# Altium PCB PCB.PcbDoc (part 2 of 2)
Units mm, origin at the board's own origin, x right, y up, seen from the top; angles counter-clockwise.
Board outline 180 x 79 mm, 2 copper layers (Top Layer, Bottom Layer); 169 components, 170 nets, 770 pads, 214 vias.
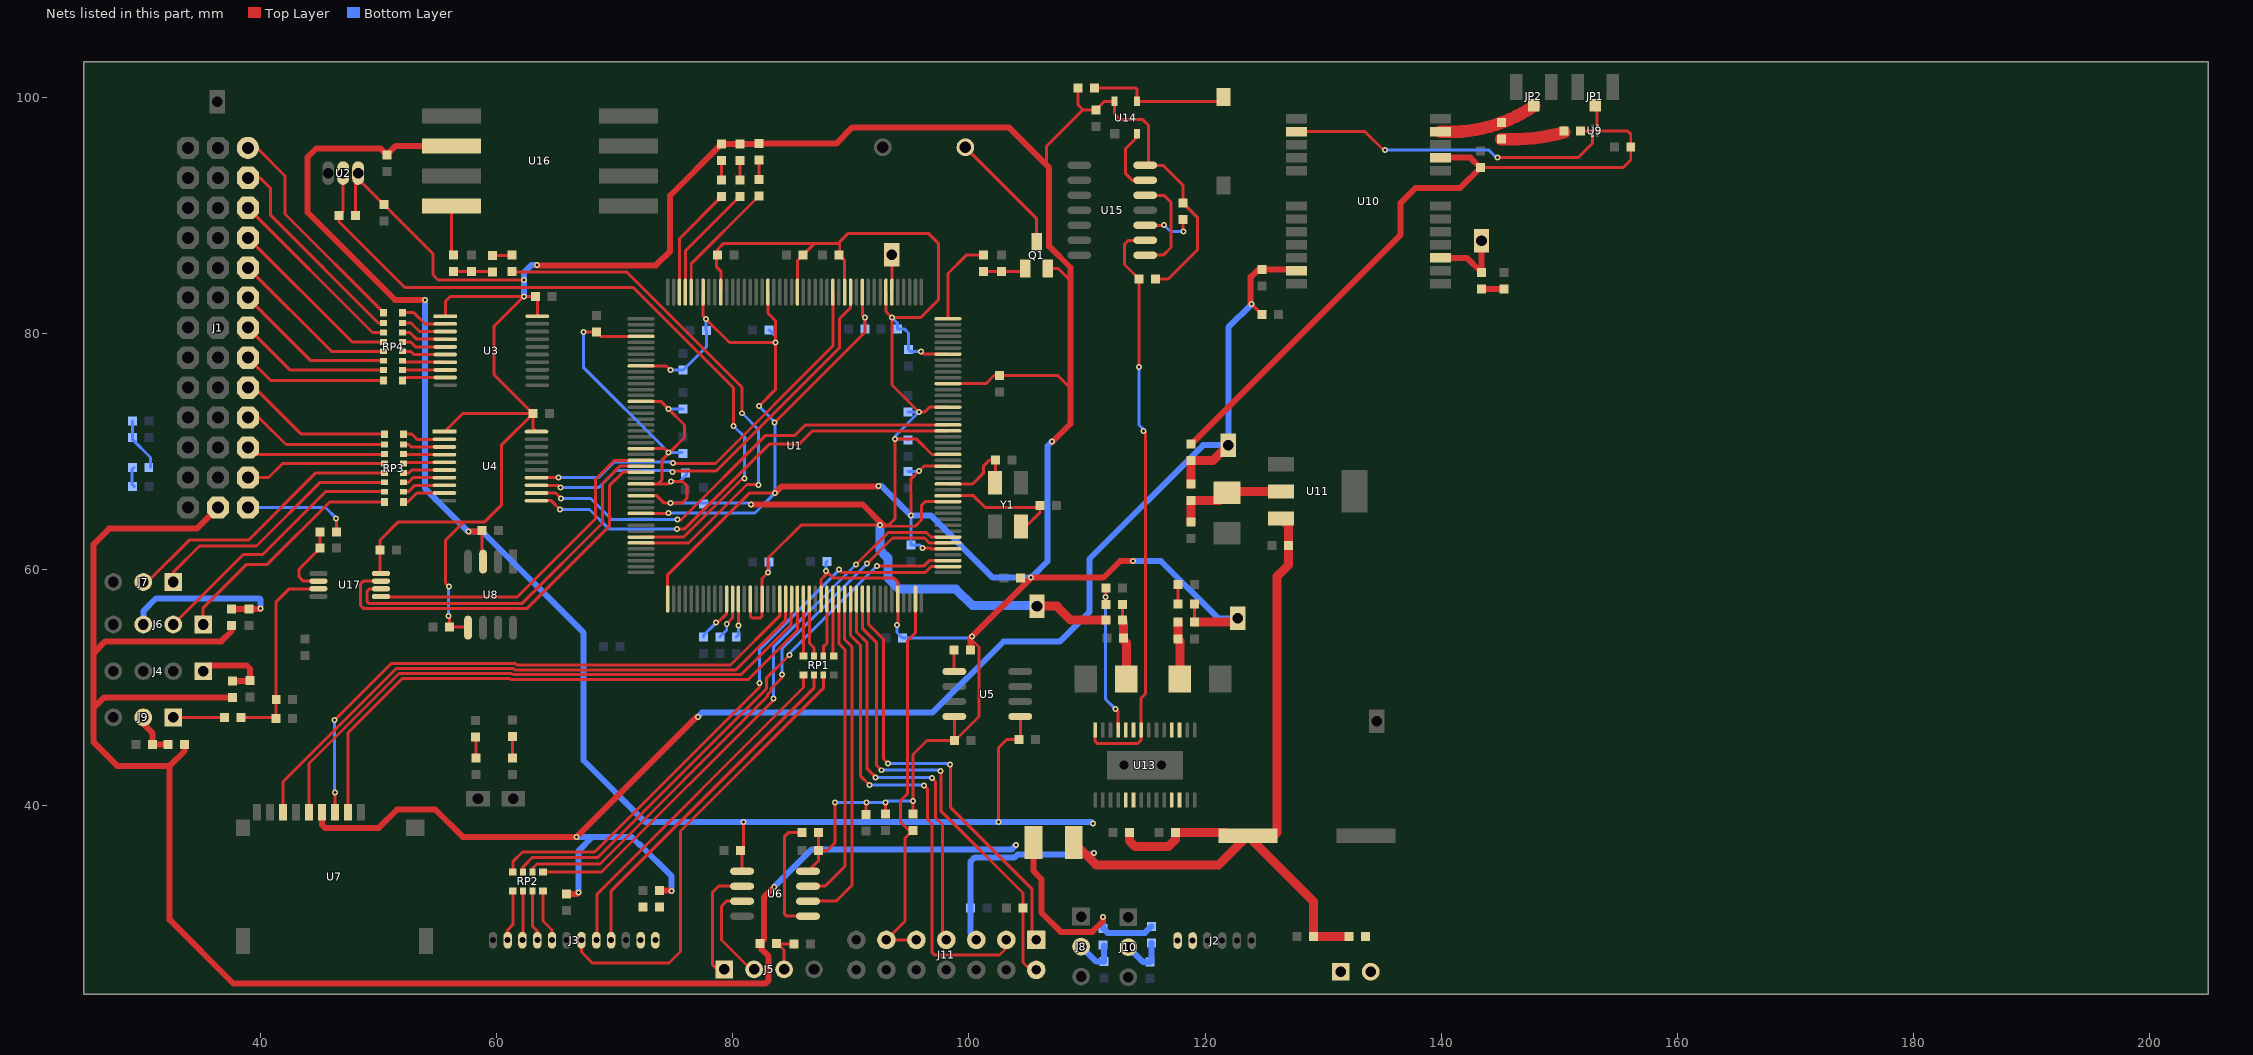
[diagram p2: the nets of this part, all layers, seen from the top]

## Via types
v1: diameter 0.508, hole 0.254, Top Layer to Bottom Layer, 214 vias

## Nets (pads, with @x,y where several pads share a name; then routed paths per layer and width w, separated by ;. In a path a pad name is that pad's centre, name@x,y a point inside that pad or via, vN(x,y) a via of type N, cw(c..) or ccw(c..) an arc to the next point about the centre after c; other vN are vias at no path point) (continued)
ISENSOR_CLK: J3.7 RP1.3 | length 38.6
  Top Layer w0.254: J3.7@67.159,28.575 67.159,27.566 68.075,26.65 74.575,26.65 75.55,27.625 75.55,37.825 87.654,49.929 RP1.3@87.654,51.054
ISENSOR_DIO1: J3.2 RP2.1 | length 4.4
  Top Layer w0.254: J3.2@60.911,28.575 60.911,29.436 61.35,29.875 RP2.1@61.35,32.75
ISENSOR_DIO2: J3.3 RP2.2 | length 4.2
  Top Layer w0.254: J3.3@62.156,28.575 62.225,28.644 RP2.2@62.225,32.75
ISENSOR_DIO3: J3.4 RP2.3 | length 4.3
  Top Layer w0.254: RP2.3@63.025,32.75 63.025,29.75 63.426,29.349 J3.4@63.426,28.575
ISENSOR_DIO4: J3.5 RP2.4 | length 4.5
  Top Layer w0.254: RP2.4@63.9,32.75 63.9,30.2 64.67,29.43 J3.5@64.67,28.575
ISENSOR_SIMO: J3.8 RP1.1 | length 29.7
  Top Layer w0.254: J3.8@68.429,28.575 68.475,28.621 68.475,32.475 85.979,49.979 RP1.1@85.979,51.054
ISENSOR_SOMI: J3.9 RP1.2 | length 29.6
  Top Layer w0.254: J3.9@69.679,28.575 69.679,32.757 86.854,49.932 RP1.2@86.854,51.054
LAN_EN: U9.6 U10.14 | length 27.3
  Top Layer w0.254: U10.14@127.758,97.086 133.564,97.086 135.25,95.4 v1(135.25,95.525) ; v1(144.775,94.9) 151.625,94.9 152.835,96.11 U9.6@152.835,96.755
  Bottom Layer w0.254: v1(135.25,95.525) 144.05,95.525 144.725,94.85 v1(144.775,94.9)
NetB1_1: B1.1 Q1.3 | length 10.5
  Top Layer w0.254: B1.1@99.691,95.762 105.74,89.712 Q1.3@105.74,87.757
NetC23_1: C23.1 U1.56 | length 3.7
  Top Layer w0.254: v1(79.475,55.375) 79.967,55.867 U1.56@79.967,57.485
  Bottom Layer w0.254: C23.1@78.883,54.26 79.475,54.852 v1(79.475,55.375)
NetC24_1: C24.1 U1.55 | length 4.1
  Top Layer w0.254: v1(78.575,55.475) 78.7,55.475 79.467,56.242 U1.55@79.467,57.485
  Bottom Layer w0.254: C24.1@77.486,54.26 77.486,54.386 v1(78.575,55.475)
NetC25_2: C25.2 U1.104 Y1.3 | length 7.2
  Top Layer w0.254: U1.104@98.217,67.235 100.31,67.235 101.25,68.175 101.25,68.775 101.725,69.25 C25.2@102.253,69.25 102.253,67.378 Y1.3@102.2,67.325
NetC26_2: C26.2 U1.102 Y1.1 | length 10.9
  Top Layer w0.254: U1.102@98.217,66.235 100.365,66.235 101.35,65.25 105.853,65.25 C26.2@106.003,65.4 106.003,64.803 104.825,63.625 Y1.1@104.4,63.625
NetC27_2: C27.2 Q1.1 R6.2 | length 3.7
  Top Layer w0.254: R6.2@101.219,85.217 C27.2@102.743,85.217 104.521,85.217 Q1.1@104.775,85.471
NetC37_1: C37.1 L1.2 | length 5.4
  Top Layer w1.067: C37.1@145.125,96.45 ccw(c145.962,113.288) L1.2@150.456,97.039
NetC45_1: C45.1 C47.2 R15.2 U11.2 | length 9.8
  Top Layer w0.762: C47.2@118.8,63.997 118.8,65.816 R15.2@118.828,65.844 121.241,65.844 C45.1@121.876,66.479 122.003,66.606 U11.2@126.448,66.606
NetC48_2: C48.2 C49.1 R19.2 U13.17 U13.18 | length 4.9
  Top Layer w0.762: R19.2@117.708,55.523 117.703,55.518 C48.2@117.703,54.1 117.871,53.932 C49.1@117.871,50.7
NetC50_2: C50.2 C51.1 R17.1 R21.2 U13.23 U13.24 | length 6.2
  Top Layer w0.254: R21.2@112.997,55.7 113,55.703 R17.1@113,57
  Top Layer w0.762: R21.2@113.09,55.523 113.09,54.013 113.329,53.774 C51.1@113.329,50.7
NetD1_1: D1.1 R33.2 U17.2 | length 6.4
  Top Layer w0.254: U17.2@44.875,59 43.6,59 43.225,59.375 43.225,60 D1.1@45.025,61.8 45.025,63.153 R33.2@45.003,63.175
NetD2_1: D2.1 R32.1 R34.2 U17.3 | length 16.7
  Top Layer w0.254: R34.2@38.325,47.425 D2.1@41.2,47.425 ; D2.1@41.272,47.375 41.272,48.941 R32.1@41.302,48.971 ; R32.1@41.3,49.021 41.3,57.25 42.4,58.35 U17.3@44.875,58.35
NetFB1_1: FB1.1 J3.11 J3.12 VDR1.2
NetFB2_1: FB2.1 J4.1 VDR4.2 | length 6.8
  Top Layer w0.508: J4.1@35.115,51.375 35.59,51.85 38.8,51.85 39.075,51.575 VDR4.2@39.075,50.572 39.051,50.548 FB2.1@37.6,50.548
NetFB3_1: FB3.1 J5.3 VDR2.2 | length 3.7
  Top Layer w0.254: J5.3@84.332,26.098 84.332,27.749 83.824,28.257 VDR2.2@85.158,28.257
NetFB4_1: FB4.1 J6.3 VDR3.2 | length 14.8
  Top Layer w0.508: FB4.1@37.525,56.623 38.998,56.623 VDR3.2@39,56.622 39.922,56.622 v1(39.975,56.675)
  Bottom Layer w0.508: J6.3@30.035,55.325 30.035,56.46 31.1,57.525 39.875,57.525 39.975,57.425 v1(39.975,56.675)
NetFB5_1: FB5.1 J10.2 VDR5.2 | length 4
  Bottom Layer w0.254: VDR5.2@115.35,26.722 VDR5.2@115.45,26.822
  Bottom Layer w0.508: J10.2@113.5,27.985 114.763,26.722 VDR5.2@115.35,26.722 ; VDR5.2@115.45,26.822 FB5.1@115.45,28.352
NetFB6_1: FB6.1 J8.2 VDR6.1 | length 3.9
  Bottom Layer w0.254: FB6.1@111.375,28.176 FB6.1@111.425,28.127
  Bottom Layer w0.508: J8.2@109.5,28.035 110.785,26.75 VDR6.1@111.425,26.75 FB6.1@111.425,28.127
NetFB7_1: FB7.1 J9.2 VDR7.2 | length 4
  Top Layer w0.254: J9.2@30.035,46.915 J9.2@30.035,47.45
  Top Layer w0.508: J9.2@30.035,46.915 30.805,46.145 VDR7.2@30.805,45.149 FB7.1@32.139,45.149
NetFB8_1: FB8.1 SW1.2
NetFB10_2: FB10.2 R26.2 | length 1.8
  Top Layer w0.254: R26.2@58.175,45.803 58.225,45.753 FB10.2@58.225,44.023
NetFB11_2: FB11.2 R27.2 | length 1.8
  Top Layer w0.254: R27.2@61.331,45.844 R27.2@61.331,45.844 FB11.2@61.332,44.004
NetFB12_1: FB12.1 R24.2 R25.1 | length 4.6
  Bottom Layer w0.254: R24.2@29.103,72.575 29.103,71.022 30.649,69.476 FB12.1@30.649,68.625
NetFB12_2: FB12.2 R28.2 | length 1.7
  Bottom Layer w0.254: FB12.2@29.252,68.625 29.1,68.474 29.1,67.203 R28.2@29.278,67.025
NetFB13_1: FB13.1 R29.2 R30.1 | length 3.3
  Top Layer w0.254: R30.1@56.326,85.253 R29.2@57.85,85.253 59.564,85.253 FB13.1@59.628,85.19
NetFB13_2: FB13.2 R31.2 | length 1.7
  Top Layer w0.254: FB13.2@59.628,86.587 61.216,86.587 R31.2@61.279,86.65
NetJP1_2: JP1.2 U9.3 | length 1.8
  Top Layer w0.254: JP1.2@153.07,99.327 153.235,99.162 U9.3@153.235,97.555
NetK1_2: K1.2 R22.1 U14.3 | length 12.2
  Top Layer w0.254: R22.1@110.625,100.775 114.15,100.775 114.236,100.689 U14.3@114.236,99.646 121.196,99.646 K1.2@121.575,100.025
NetL1_1: L1.1 U9.5 | length 1
  Top Layer w0.254: L1.1@151.828,97.128 151.856,97.155 U9.5@152.835,97.155
NetLED1_2: LED1.2 R2.2 | length 1.7
  Top Layer w0.254: R2.2@82.201,93.028 LED1.2@82.201,94.679
NetLED2_2: LED2.2 R3.2 | length 1.7
  Top Layer w0.254: R3.2@80.6,93.003 LED2.2@80.6,94.654
NetLED3_2: LED3.2 R4.2 | length 1.7
  Top Layer w0.254: R4.2@79.05,93.002 LED3.2@79.05,94.653
NetLED4_1: LED4.1 R20.1 | length 1.7
  Top Layer w0.254: R20.1@117.708,57.047 LED4.1@117.708,58.698
NetLED5_1: LED5.1 R39.1 | length 1.9
  Top Layer w0.508: R39.1@143.44,83.743 LED5.1@145.345,83.743
NetR1_2: R1.2 U1.57 | length 3.3
  Top Layer w0.254: v1(80.45,55.225) 80.467,55.242 U1.57@80.467,57.485
  Bottom Layer w0.254: R1.2@80.28,54.26 80.45,54.43 v1(80.45,55.225)
NetR2_1: R2.1 U1.172 | length 10.5
  Top Layer w0.254: U1.172@76.467,83.485 76.467,85.897 R2.1@82.201,91.631
NetR3_1: R3.1 U1.173 | length 10
  Top Layer w0.254: U1.173@75.967,83.485 75.967,86.973 R3.1@80.6,91.606
NetR4_1: R4.1 U1.174 | length 9.6
  Top Layer w0.254: U1.174@75.467,83.485 75.467,88.022 R4.1@79.05,91.605
NetR6_1: R6.1 U1.132 | length 7.5
  Top Layer w0.254: U1.132@98.217,81.235 98.217,85.067 99.764,86.614 R6.1@101.219,86.614
NetR8_1: R8.1 U5.5 | length 1.8
  Top Layer w0.254: R8.1@98.725,53.175 98.725,51.372 U5.5@98.757,51.34
NetR9_1: R9.1 U6.5 | length 10.3
  Top Layer w0.254: R9.1@85.852,37.719 84.719,37.719 84.35,37.35 84.35,30.825 84.568,30.607 U6.5@86.36,30.607
NetR17_2: R17.2 R18.2 U13.25 | length 13.1
  Top Layer w0.254: R17.2@111.603,57 R18.2@111.603,58.4 ; v1(112.4,48.175) 112.639,47.936 U13.25@112.639,46.378
  Bottom Layer w0.254: v1(111.575,57.675) 111.575,49 v1(112.4,48.175)
NetR23_1: R23.1 U15.10 | length 4.5
  Top Layer w0.254: U15.10@114.935,89.154 116.504,89.154 v1(116.525,89.175) ; R23.1@118.15,89.625 118.15,88.65 v1(118.175,88.625)
  Bottom Layer w0.254: v1(116.525,89.175) 117.075,88.625 v1(118.175,88.625)
NetR30_2: R30.2 U16.4 | length 4.5
  Top Layer w0.254: R30.2@56.109,86.867 R30.2@56.326,86.65 ; R30.2@56.134,86.592 U16.4@56.134,90.805
NetRP1_5: RP1.5 U1.73 | length 4.9
  Top Layer w0.254: U1.73@88.467,57.485 88.467,52.716 RP1.5@88.529,52.654
NetRP1_6: RP1.6 U1.72 | length 5
  Top Layer w0.254: RP1.6@87.654,52.654 87.654,53.429 87.967,53.742 U1.72@87.967,57.485
NetRP1_7: RP1.7 U1.69 | length 5
  Top Layer w0.254: U1.69@86.467,57.485 86.467,53.758 86.854,53.371 RP1.7@86.854,52.654
NetRP1_8: RP1.8 U1.68 | length 4.8
  Top Layer w0.254: U1.68@85.967,57.485 85.967,52.666 RP1.8@85.979,52.654
NetRP2_5: RP2.5 U1.95 | length 49
  Top Layer w0.254: RP2.5@63.9,34.35 68.866,34.35 83.45,48.934 v1(83.45,49.075) ; v1(90.425,60.4) 93.15,63.125 96.388,63.125 96.778,62.735 U1.95@98.217,62.735
  Bottom Layer w0.254: v1(83.45,49.075) 83.425,49.1 83.425,53.4 v1(90.425,60.4)
NetRP2_6: RP2.6 U1.94 | length 48.9
  Top Layer w0.254: RP2.6@63.025,34.35 63.025,34.664 63.4,35.039 68.739,35.039 82.917,49.217 82.917,49.367 83.231,49.682 83.231,49.881 84.175,50.825 v1(84.175,51.075) ; v1(91.35,60.475) 93.525,62.65 96.225,62.65 96.64,62.235 U1.94@98.217,62.235
  Bottom Layer w0.254: v1(84.175,51.075) 84.175,53.3 v1(91.35,60.475)
NetRP2_7: RP2.7 U1.91 | length 47.8
  Top Layer w0.254: RP2.7@62.225,34.35 62.225,34.809 62.991,35.575 68.55,35.575 82.825,49.85 82.825,50.775 v1(84.8,52.75) ; v1(92.2,60.3) 96.2,60.3 96.635,60.735 U1.91@98.217,60.735
  Bottom Layer w0.254: v1(84.8,52.75) 84.8,52.9 v1(92.2,60.3)
NetRP2_8: RP2.8 U1.90 | length 50.2
  Top Layer w0.254: RP2.8@61.35,34.35 61.35,35.225 62.175,36.05 68.286,36.05 82.25,50.014 v1(82.25,50.375) ; v1(89,59.975) 89.225,59.75 96.325,59.75 96.81,60.235 U1.90@98.217,60.235
  Bottom Layer w0.254: v1(82.25,50.375) 82.25,53.25 82.262,53.238 v1(89,59.975)
NetRP3_9: RP3.9 U4.9 | length 3.8
  Top Layer w0.254: RP3.9@52.075,65.7 52.45,65.7 53.218,66.468 U4.9@55.555,66.468
NetRP3_10: RP3.10 U4.8 | length 3.7
  Top Layer w0.254: RP3.10@52.075,66.575 52.5,66.575 53.043,67.118 U4.8@55.555,67.118
NetRP3_11: RP3.11 U4.7 | length 3.6
  Top Layer w0.254: RP3.11@52.075,67.375 52.5,67.375 52.893,67.768 U4.7@55.555,67.768
NetRP3_12: RP3.12 U4.6 | length 3.6
  Top Layer w0.254: RP3.12@52.075,68.175 52.55,68.175 52.793,68.418 U4.6@55.555,68.418
NetRP3_13: RP3.13 U4.5 | length 3.5
  Top Layer w0.254: RP3.13@52.075,68.975 52.168,69.068 U4.5@55.555,69.068
NetRP3_14: RP3.14 U4.4 | length 3.5
  Top Layer w0.254: RP3.14@52.075,69.775 52.132,69.718 U4.4@55.555,69.718
NetRP3_15: RP3.15 U4.3 | length 3.6
  Top Layer w0.254: RP3.15@52.075,70.575 52.525,70.575 52.732,70.368 U4.3@55.555,70.368
NetRP3_16: RP3.16 U4.2 | length 3.7
  Top Layer w0.254: RP3.16@52.075,71.45 52.8,71.45 53.232,71.018 U4.2@55.555,71.018
NetRP4_9: RP4.9 U3.9 | length 3.7
  Top Layer w0.254: RP4.9@52,76 52.25,76.25 U3.9@55.625,76.25
NetRP4_10: RP4.10 U3.8 | length 3.6
  Top Layer w0.254: RP4.10@52,76.875 52.025,76.9 U3.8@55.625,76.9
NetRP4_11: RP4.11 U3.7 | length 3.7
  Top Layer w0.254: RP4.11@52,77.675 52.125,77.55 U3.7@55.625,77.55
NetRP4_12: RP4.12 U3.6 | length 3.7
  Top Layer w0.254: RP4.12@52,78.475 52.675,78.475 52.95,78.2 U3.6@55.625,78.2
NetRP4_13: RP4.13 U3.5 | length 3.8
  Top Layer w0.254: RP4.13@52,79.275 52.675,79.275 53.1,78.85 U3.5@55.625,78.85
NetRP4_14: RP4.14 U3.4 | length 3.9
  Top Layer w0.254: RP4.14@52,80.075 52.625,80.075 53.2,79.5 U3.4@55.625,79.5
NetRP4_15: RP4.15 U3.3 | length 3.9
  Top Layer w0.254: RP4.15@52,80.875 52.725,80.875 53.45,80.15 U3.3@55.625,80.15
NetRP4_16: RP4.16 U3.2 | length 4
  Top Layer w0.254: RP4.16@52,81.75 52.95,81.75 53.9,80.8 U3.2@55.625,80.8
NetU14_2: U14.2 U15.13 | length 5.7
  Top Layer w0.254: U14.2@114.236,96.921 114.236,96.611 113.275,95.65 113.275,93.525 113.836,92.964 U15.13@114.935,92.964
NetU15_8: U15.8 U15.12 | length 8.7
  Top Layer w0.254: U15.8@114.935,86.614 116.464,86.614 117.125,87.275 117.125,91.1 116.531,91.694 U15.12@114.935,91.694
POWER_RESET: R16.1 U13.22 U13.28 U15.9 | length 49.9
  Top Layer w0.254: U13.28@110.689,46.378 110.689,45.436 110.9,45.225 114.275,45.225 114.589,45.539 U13.22@114.589,46.378 114.589,49.089 114.975,49.475 114.975,71.55 v1(114.8,71.725) ; v1(114.4,77.125) R16.1@114.4,84.6 113.175,85.825 113.175,87.55 113.509,87.884 U15.9@114.935,87.884
  Bottom Layer w0.254: v1(114.4,77.125) 114.4,72.225 114.8,71.825 v1(114.8,71.725)
PWM1: J1.1 RP4.1 | length 19.2
  Top Layer w0.254: J1.1@38.897,95.713 39.662,95.713 42.05,93.325 42.05,90.1 RP4.1@50.4,81.75
PWM2: J1.4 RP4.2 | length 17.9
  Top Layer w0.254: J1.4@38.897,93.173 39.927,93.173 40.825,92.275 40.825,90 49.95,80.875 RP4.2@50.4,80.875
PWM3: J1.7 RP4.3 | length 15.9
  Top Layer w0.254: J1.7@38.897,90.633 49.455,80.075 RP4.3@50.4,80.075
PWM4: J1.10 RP4.4 | length 15.2
  Top Layer w0.254: J1.10@38.897,88.093 47.715,79.275 RP4.4@50.4,79.275
PWM5: J1.13 RP4.5 | length 14.4
  Top Layer w0.254: J1.13@38.897,85.553 45.975,78.475 RP4.5@50.4,78.475
PWM6: J1.16 RP4.6 | length 13.7
  Top Layer w0.254: J1.16@38.897,83.013 44.235,77.675 RP4.6@50.4,77.675
PWM7: J1.19 RP4.7 | length 13
  Top Layer w0.254: J1.19@38.897,80.473 42.495,76.875 RP4.7@50.4,76.875
PWM8: J1.22 RP4.8 | length 12.3
  Top Layer w0.254: J1.22@38.897,77.933 40.83,76 RP4.8@50.4,76
PWM9: J1.25 RP3.1 | length 13.2
  Top Layer w0.254: J1.25@38.897,75.393 39.482,75.393 43.425,71.45 RP3.1@50.475,71.45
PWM10: J1.28 RP3.2 | length 12.5
  Top Layer w0.254: J1.28@38.897,72.853 39.847,72.853 42.125,70.575 RP3.2@50.475,70.575
PWM11: J1.31 RP3.3 | length 11.8
  Top Layer w0.254: J1.31@38.897,70.313 39.485,69.725 50.425,69.725 RP3.3@50.475,69.775
PWM12: J1.34 RP3.4 | length 12.1
  Top Layer w0.254: J1.34@38.897,67.773 40.648,67.773 41.85,68.975 RP3.4@50.475,68.975
RF_IN: C37.2 JP2.2 U10.11 | length 8.6
  Top Layer w0.559: JP2.2@147.698,99.245 JP2.2@147.912,99.245
  Top Layer w1.067: U10.11@139.958,97.086 ccw(c140.76,109.626) JP2.2@147.889,99.279
S\B\U\S\_\E\N\: U1.27 U17.7 | length 34.3
  Top Layer w0.254: U17.7@50.175,59 48.675,59 48.45,58.775 48.45,56.925 48.675,56.7 62.575,56.7 69.525,63.65 69.525,67.075 70.685,68.235 U1.27@72.217,68.235
SBUS_RX: J9.1 R34.1 | length 4.4
  Top Layer w0.254: J9.1@32.575,47.45 36.903,47.45 R34.1@36.928,47.425
SBUS_TX: J1.37 R33.1 | length 9
  Top Layer w0.254: v1(46.375,64.325) 46.4,64.3 R33.1@46.4,63.175
  Bottom Layer w0.254: J1.37@38.897,65.233 45.467,65.233 v1(46.375,64.325)
SCIRXA: J7.1 RP3.6 | length 21.9
  Top Layer w0.254: J7.1@32.575,58.925 32.575,59.75 34.8,61.975 39.625,61.975 45.025,67.375 RP3.6@50.475,67.375
SCIRXC: J6.1 RP3.8 | length 20.8
  Top Layer w0.254: J6.1@35.45,55.325 J6.1@35.115,55.325 35.115,56.74 38.8,60.425 40.55,60.425 45.825,65.7 RP3.8@50.475,65.7
SCIRXDA: U1.145 U4.13 | length 35.7
  Top Layer w0.254: U4.13@63.351,67.118 65.182,67.118 v1(65.375,66.925) ; v1@75,68.325 78.575,68.325 89.025,78.775 89.025,81.225 89.967,82.167 U1.145@89.967,83.485
  Bottom Layer w0.254: v1(65.375,66.925) 68.625,66.925 70.075,68.375 74.75,68.375 v1(74.875,68.25)
SCIRXDB: U1.26 U17.6 | length 32.2
  Top Layer w0.254: U17.6@50.175,58.35 49.2,58.35 48.975,58.125 48.975,57.3 49.15,57.125 62.15,57.125 68.95,63.925 68.95,67.275 70.41,68.735 U1.26@72.217,68.735
SCIRXDC: U1.113 U4.11 | length 39.3
  Top Layer w0.254: U4.11@63.351,65.818 64.607,65.818 v1(65.35,65.075) ; v1(75.25,63.4) 75.875,63.4 83.075,70.6 85.6,70.6 86.735,71.735 U1.113@98.217,71.735
  Bottom Layer w0.254: v1(65.35,65.075) 67.85,65.075 69.525,63.4 v1(75.25,63.4)
SCITXA: J7.2 RP3.5 | length 24.3
  Top Layer w0.254: J7.2@30.035,58.925 30.375,58.925 33.925,62.475 38.95,62.475 44.65,68.175 RP3.5@50.475,68.175
SCITXC: J6.2 RP3.7 | length 22.6
  Top Layer w0.254: J6.2@32.575,55.325 38.525,61.275 40.175,61.275 45.475,66.575 RP3.7@50.475,66.575
SCITXDA: U1.148 U4.14 | length 34.3
  Top Layer w0.254: U4.14@63.351,67.768 65.218,67.768 v1(65.225,67.775) ; v1@75,68.975 78.525,68.975 88.467,78.917 U1.148@88.467,83.485
  Bottom Layer w0.254: v1(65.225,67.775) 68.625,67.775 69.95,69.1 74.85,69.1 v1(74.925,69.025)
SCITXDB: U1.25 U17.5 | length 28.8
  Top Layer w0.254: U17.5@50.14,57.65 61.725,57.65 68.35,64.275 68.35,67.625 69.96,69.235 U1.25@72.217,69.235
SCITXDC: U1.114 U4.12 | length 38.9
  Top Layer w0.254: U4.12@63.351,66.468 64.982,66.468 v1(65.45,66) ; 75.55,64.175 75.6,64.175 82.775,71.35 85.25,71.35 86.135,72.235 U1.114@98.217,72.235
  Bottom Layer w0.254: v1(65.45,66) 67.95,66 69.725,64.225 v1(75.3,64.225)
SCL: J5.2 U6.3 | length 9.1
  Top Layer w0.254: U6.3@80.772,31.877 79.452,31.877 79.025,31.45 79.025,28.6 81.527,26.098 J5.2@81.792,26.098 J5.2@81.425,26.465
SCLA: U1.75 U6.6 | length 28.8
  Top Layer w0.254: U6.6@86.36,31.877 88.727,31.877 90.1,33.25 90.1,53.425 89.467,54.058 U1.75@89.467,57.485
SDA: J5.1 U6.2 | length 10.6
  Top Layer w0.254: J5.1@78.875,26.475 J5.1@79.252,26.098 ; J5.1@79.125,25.65 78.25,26.525 78.25,32.625 78.772,33.147 U6.2@80.772,33.147
SDAA: U1.74 U6.7 | length 26.7
  Top Layer w0.254: U6.7@86.36,33.147 87.797,33.147 89.5,34.85 89.5,53.175 88.967,53.708 U1.74@88.967,57.485
SDCARD_CS: U1.67 U7.2 | length 51.1
  Top Layer w0.254: U7.2@47.381,39.4 47.381,46.156 51.975,50.75 61.104,50.75 61.18,50.674 81.299,50.674 85.467,54.842 U1.67@85.467,57.485
SDCARD_MISO: U1.65 U7.7 | length 52.7
  Top Layer w0.254: U7.7@41.881,39.4 41.881,42.006 51.475,51.6 61.404,51.6 61.516,51.487 80.262,51.487 84.467,55.692 U1.65@84.467,57.485
SDCARD_MOSI: U1.64 U7.3 | length 50.7
  Top Layer w0.254: v1(46.275,41.075) 46.281,41.069 U7.3@46.281,39.4 ; v1@46.275,47.25 51.031,52.006 61.572,52.006 61.685,51.894 79.794,51.894 83.967,56.067 U1.64@83.967,57.485
  Bottom Layer w0.254: v1(46.225,47.25) 46.225,41.125 v1(46.275,41.075)
SDCARD_SCLK: U1.66 U7.5 | length 52.1
  Top Layer w0.254: U7.5@44.081,39.4 44.081,43.556 51.7,51.175 61.254,51.175 61.348,51.081 80.706,51.081 84.925,55.3 84.925,57.443 U1.66@84.967,57.485
SKY_SPEED_SENSE: R31.1 U1.39 | length 44.5
  Top Layer w0.254: R31.1@61.304,84.978 61.526,85.2 71,85.2 80.775,75.425 v1(80.775,73.225) ; U1.39@72.217,62.235 76.235,62.235 81.187,67.187 v1@82.213,67.187
  Bottom Layer w0.254: v1@80.775,73.2 80.8,73.2 82.15,71.85 v1(82.15,67.15)
T\R\S\T\: J11.2 R37.2 U1.78 | length 41.1
  Top Layer w0.254: U1.78@90.967,57.485 90.967,55.008 92.15,53.825 92.15,43.425 v1(92.6,42.975) ; v1(97.6,42.925) 97.65,42.875 97.65,39.5 104.575,32.575 104.575,26.685 J11.2@105.8,25.46
  Bottom Layer w0.254: v1(92.6,42.975) 97.55,42.975 v1(97.6,42.925)
TCK: J11.9 J11.11 R35.2 U1.87 | length 33.7
  Top Layer w0.254: J11.9@95.467,28 94.892,28.575 92.975,28.575 94.6,30.2 94.6,37.228 R35.2@95.25,37.878 94.922,37.878 94.2,38.6 94.2,40.383 94.775,40.958 94.775,53.926 95.467,54.618 U1.87@95.467,57.485
TDI: J11.3 U1.76 | length 42.2
  Top Layer w0.254: U1.76@89.967,57.485 89.967,54.408 90.825,53.55 90.825,42.475 v1(91.575,41.725) ; v1(96.175,41.7) 96.5,41.375 96.5,38.8 96.875,38.425 96.875,27.55 97.1,27.325 102.585,27.325 J11.3@103.26,28
  Bottom Layer w0.254: v1(91.575,41.725) 96.15,41.725 v1(96.175,41.7)
TDO\: J11.7 U1.77 | length 35.4
  Top Layer w0.254: U1.77@90.467,57.485 90.467,54.683 91.375,53.775 91.375,43.1 v1@92.1,42.375 ; v1(96.875,42.3) 97.15,42.025 97.15,38.975 97.75,38.375 97.75,28.43 J11.7@98.18,28
  Bottom Layer w0.254: v1(92.1,42.35) 96.825,42.35 v1(96.875,42.3)
TEMP_DQ: R7.2 U1.38 U2.2 | length 62.5
  Top Layer w0.254: U2.2@46.97,93.575 46.97,90.342 R7.2@46.603,89.975 46.603,89.472 52.2,83.875 71.55,83.875 80.05,75.375 v1(80.05,72.15) ; U1.38@72.217,62.735 75.835,62.735 80.8,67.7 v1(80.975,67.7)
  Bottom Layer w0.254: v1(80.05,72.15) 81.038,71.162 80.975,71.1 v1(80.975,67.7)
TIMEPLUS: R39.2 TP6.1 U10.3 | length 6.7
  Top Layer w0.508: U10.3@139.958,86.386 142.194,86.386 R39.2@143.431,85.149 ; TP6.1@143.431,87.843 R39.2@143.431,85.149 ; R39.2@143.44,85.14 R39.2@143.431,85.149
TMS: J11.1 U1.79 | length 38.4
  Top Layer w0.254: U1.79@91.467,57.485 91.467,55.358 92.75,54.075 92.75,43.925 v1@93.125,43.55 ; v1(98.375,43.475) 98.45,43.4 98.45,39.8 105.325,32.925 105.325,28.475 J11.1@105.8,28
  Bottom Layer w0.254: v1(93.15,43.55) 98.3,43.55 v1(98.375,43.475)
V5: J2.1 J2.2 SW1.1
V\D\D\5\_\P\E\R\I\P\H\_\C\E\: 
V\D\D\5\_\P\E\R\I\P\H\_\F\A\U\L\T\: 
VCC3V3: C40.2 FB1.2 FB9.1 R11.1 R12.1 R15.1 TP1.1 U7.4 U10.23 | length 140.1
  Top Layer w0.254: v1@123.875,82.55 R11.1@124.85,81.575 ; C40.2@124.547,85.422 C40.2@124.85,85.422 ; U10.23@127.622,85.422 U10.23@127.758,85.286
  Top Layer w0.508: U7.4@45.181,39.4 45.181,38.344 45.425,38.1 50,38.1 51.55,39.65 54.775,39.65 57.1,37.325 v1(66.75,37.325) 76.925,47.5 v1(77.025,47.5) ; R12.1@65.9,32.475 66.775,32.475 v1(66.9,32.6) ; FB1.2@73.787,32.766 74.759,32.766 v1(74.775,32.75) ; v1@123.875,82.55 123.875,84.75 C40.2@124.547,85.422 ; C40.2@124.85,85.422 U10.23@127.622,85.422
  Top Layer w0.762: R15.1@118.828,67.241 FB9.1@118.828,69.209 120.672,69.209 TP1.1@121.981,70.518
  Bottom Layer w0.508: v1(66.75,37.325) 68.1,37.325 ; v1(66.9,32.6) 66.9,36.125 68.1,37.325 ; v1(74.775,32.75) 74.775,34.025 72.115,36.685 72.043,36.685 71.403,37.325 68.1,37.325 ; v1(77.025,47.5) 77.375,47.85 96.9,47.85 102.925,53.875 107.7,53.875 110.2,56.375 110.2,60.875 119.843,70.518 TP1.1@121.981,70.518 121.981,80.506 v1(123.95,82.475)
VCC_RF: C38.1 C39.1 FB9.2 U9.2 U10.9 | length 57.8
  Top Layer w0.254: U10.9@139.958,94.886 U10.9@140.069,94.775 ; C39.1@143.325,94.05 143.35,94.05 155.45,94.05 156.075,94.675 C38.1@156.075,95.775 156.075,96.875 155.795,97.155 U9.2@153.235,97.155
  Top Layer w0.508: FB9.2@118.828,70.606 136.585,88.363 136.585,91.06 137.825,92.3 141.6,92.3 C39.1@143.35,94.05 ; U10.9@139.958,94.886 142.489,94.886 C39.1@143.325,94.05
VDD1V9: C1.1 C3.1 C5.1 C7.1 C9.1 C12.1 C14.1 C16.1 C17.1 C18.1 C20.1 C21.1 C22.1 R21.1 TP3.1 U1.4 U1.15 U1.23 U1.29 U1.31 U1.59 U1.61 U1.101 U1.109 U1.117 U1.126 U1.139 U1.146 U1.154 U1.167 | length 196.5
  Top Layer w0.254: v1(67.325,80.1) C1.1@68.45,80.1 68.815,79.735 U1.4@72.217,79.735 U1.4@72.207,79.725 ; U1.31@72.207,66.225 U1.31@72.217,66.235 73.54,66.235 74.175,65.6 v1(74.725,65.6) 75.675,65.6 76.1,66.025 76.1,67.075 75.725,67.45 v1(74.75,67.45) 74.535,67.235 73.615,67.235 ; U1.29@72.217,67.235 73.615,67.235 ; U1.23@72.217,70.235 74.24,70.235 v1@74.6,69.875 ; U1.15@72.217,74.235 73.89,74.235 v1(74.525,73.6) 75.9,72.225 75.9,71.175 v1@74.6,69.875 ; U1.167@78.967,83.485 78.967,85.258 78.625,85.6 78.625,86.55 C21.1@78.7,86.625 78.7,87.1 79.225,87.625 86.925,87.625 ; U1.59@81.467,57.485 81.467,56.033 81.625,55.875 82.325,55.875 82.467,56.017 U1.61@82.467,57.485 82.467,59.217 v1(82.975,59.725) 82.975,60.95 85.8,63.775 92.7,63.775 93.225,63.775 93.725,64.275 v1(93.725,71.025) 95.575,71.025 96.865,69.735 U1.109@98.217,69.735 ; U1.154@85.467,83.485 85.467,86.167 C20.1@85.95,86.65 86.925,87.625 ; U1.146@89.467,83.485 89.467,86.158 C18.1@88.975,86.65 89.05,86.725 89.05,87.625 ; v1(92.475,63.775) 92.6,63.65 95.45,63.65 95.975,64.175 95.975,65.425 96.285,65.735 U1.101@98.217,65.735 ; U1.139@92.967,83.485 92.967,81.833 v1(93.475,81.325) ; v1(95.925,78.475) 96.165,78.235 U1.126@98.217,78.235 ; U1.117@98.217,73.735 96.66,73.735 96.25,73.325 v1(95.775,73.325) 93.475,75.625 v1(93.475,81.325) ; 73.615,67.235 74,67.62 74,69.275 v1@74.6,69.875 ; 86.925,87.625 89.05,87.625 ; 89.05,87.625 89.05,87.75 89.775,88.475 96.55,88.475 97.4,87.625 97.4,82.825 95.9,81.325 v1(93.475,81.325)
  Top Layer w0.508: v1(81.55,65.5) 90.975,65.5 v1@92.7,63.775
  Top Layer w0.762: TP3.1@105.769,56.882 107.444,56.882 108.626,55.7 R21.1@111.6,55.7
  Bottom Layer w0.254: v1(67.325,80.1) 67.325,77.125 v1(74.55,69.9) C5.1@75.7,69.9 ; v1(74.525,73.6) C3.1@75.75,73.6 ; v1(74.725,65.6) 81.325,65.6 v1@81.55,65.375 ; v1(74.75,67.45) 75.5,67.45 76.05,68 C7.1@76.05,68.25 ; v1(82.975,59.725) 83.075,59.825 C9.1@83.075,60.6 ; v1(93.475,81.325) 93.925,80.875 C17.1@93.925,80.35 94.55,80.35 94.875,80.025 C16.1@94.875,78.625 95.025,78.475 v1(95.925,78.475) ; C22.1@94.825,70.975 94.775,71.025 v1(93.725,71.025) 93.725,71.275 v1(95.775,73.325) C12.1@94.85,73.325
  Bottom Layer w0.762: v1(92.475,63.775) 92.475,61.6 92.962,61.113 93.125,60.95 93.125,59.3 94.1,58.325 98.9,58.325 100.3,56.925 TP3.1@105.769,56.925
VDD3V3: C2.1 C4.1 C6.1 C8.1 C10.1 C11.1 C13.1 C15.1 C19.1 C28.2 C31.2 C32.2 C33.2 C34.2 C35.2 C52.2 C55.1 LED1.1 LED2.1 LED3.1 Q1.2 R5.2 R7.1 R8.2 R9.2 R16.2 R19.1 R20.2 R22.2 R23.2 R35.1 R36.1 R38.1 TP2.1 U1.9 U1.34 U1.45 U1.71 U1.84 U1.93 U1.107 U1.121 U1.143 U1.159 U1.170 U2.3 U3.1 U3.20 U4.1 U4.20 U5.8 U6.8 U8.5 U14.4 U15.14 U17.8 | length 440
  Top Layer w0.254: R7.1@48,89.975 48,93.335 U2.3@48.24,93.575 48.24,93.082 C28.2@50.425,90.897 54.575,86.747 54.575,84.95 55,84.525 v1@62.225,84.525 ; U17.8@50.175,59.65 50.075,59.75 C55.1@50.075,61.625 50.075,62.45 51.65,64.025 58.975,64.025 60.375,65.425 60.375,70.519 C32.2@63.048,73.192 ; U4.1@55.555,71.668 57.079,73.192 C32.2@63.048,73.192 ; U3.1@55.625,81.45 55.625,82.7 56.05,83.125 v1(62.275,83.125) ; v1(55.9,56.05) 55.972,55.978 C35.2@55.972,55.122 ; C35.2@55.95,55.122 C35.2@55.972,55.1 C35.2@55.972,55.122 ; v1(55.95,58.525) 55.65,58.825 55.65,62.475 57.1,63.925 ; U8.5@57.554,55.061 57.493,55.122 C35.2@55.972,55.122 ; U4.20@63.351,71.668 63.048,71.971 C32.2@63.048,73.192 ; U3.20@63.421,81.45 63.421,82.957 C31.2@63.253,83.125 v1(62.275,83.125) ; U1.34@72.217,64.735 74.51,64.735 v1(74.55,64.775) ; U1.9@72.217,77.235 74.34,77.235 v1(74.7,76.875) ; U1.45@74.467,57.485 74.467,59.542 81.375,66.45 v1(83.55,66.45) ; U1.170@77.467,83.485 77.467,81.458 v1(77.725,81.2) 79.7,79.225 v1(83.625,79.225) ; LED1.1@82.175,96.05 LED1.1@82.201,96.076 ; v1(82.2,73.825) 83.625,75.25 v1(83.625,79.225) ; U1.159@82.967,83.485 82.967,81.708 83.625,81.05 v1(83.625,79.225) ; v1(83.525,72.425) 91.2,80.1 v1(91.2,81.325) 90.967,81.558 U1.143@90.967,83.485 ; U6.8@86.36,34.417 87.249,35.306 C33.2@87.249,36.195 ; R9.2@87.249,37.719 C33.2@87.249,36.195 ; U1.71@87.467,57.485 87.467,59.142 87.9,59.575 v1(87.9,59.85) 88.475,59.275 93.625,59.275 93.967,58.933 U1.84@93.967,57.485 93.967,55.367 v1(93.9,55.3) ; v1(88.65,40.25) 88.65,36.825 88.02,36.195 C33.2@87.249,36.195 ; R36.1@91.275,39.225 91.275,40.225 v1(91.3,40.25) ; R38.1@92.925,39.25 v1(92.925,40.25) ; v1(95.075,64.575) 95.075,67.625 v1(95.775,68.325) 96.185,68.735 U1.107@98.217,68.735 ; R35.1@95.25,39.275 v1(95.25,40.35) 95.25,44.3 96.448,45.498 C34.2@98.757,45.498 ; v1(96.05,61.825) 96.675,61.825 96.765,61.735 U1.93@98.217,61.735 U1.93@98.227,61.725 ; U1.121@98.217,75.735 101.435,75.735 102.125,76.425 C10.1@102.575,76.425 107.525,76.425 108.6,75.35 ; U5.8@98.757,47.53 C34.2@98.757,45.498 ; v1@100.122,54.147 100.85,53.419 100.85,47.525 98.823,45.498 C34.2@98.757,45.498 ; 106.575,94.25 106.575,95.841 109.667,98.933 ; Q1.2@106.68,85.471 107.579,85.471 108.6,84.45 ; R22.2@109.228,100.775 109.22,100.767 109.22,99.38 109.667,98.933 ; R16.2@115.797,84.6 116.875,84.6 119.375,87.1 119.375,89.797 R23.2@118.15,91.022 118.15,92.525 116.441,94.234 U15.14@114.935,94.234 115.225,94.524 115.225,97.6 114.725,98.1 112.825,98.1 112.336,98.589 U14.4@112.336,99.646 111.457,99.646 C52.2@110.744,98.933 109.667,98.933 ; R19.1@119.105,55.523 R20.2@119.105,57.047 ; v1(62.275,83.125) 59.75,80.6 59.75,76.49 C32.2@63.048,73.192
  Top Layer w0.508: v1@63.375,85.75 73.475,85.75 74.675,86.95 74.675,91.675 LED3.1@79.05,96.05 LED1.1@82.175,96.05 ; LED1.1@82.201,96.076 88.751,96.076 90.125,97.45 103.375,97.45 106.575,94.25 106.8,94.025 106.8,87.375 108.6,85.575 108.6,84.45 108.6,75.35 108.6,72.325 v1@107.075,70.8 ; v1(83.55,66.45) 84.125,67.025 92.325,67.025 v1(92.35,67.05) ; R8.2@100.122,53.175 100.122,54.147 v1(105.275,59.3) 111.4,59.3 112.8,60.7 v1(113.9,60.7)
  Top Layer w0.762: R19.1@119.105,55.523 122.461,55.523 TP2.1@122.781,55.843
  Bottom Layer w0.254: v1(55.9,56.05) v1@55.9,58.475 ; v1(74.55,64.775) 81.875,64.775 v1(83.55,66.45) 83.55,72.475 v1(82.2,73.825) ; v1(74.7,76.875) C8.1@75.775,76.875 77.75,78.85 C15.1@77.75,80.225 77.725,80.25 v1(77.725,81.2) ; C11.1@83.05,80.3 83.625,79.725 v1(83.625,79.225) ; v1(87.9,59.85) 87.9,60.6 C13.1@87.95,60.65 ; v1(88.65,40.25) v1(91.3,40.25) v1(92.925,40.25) 93.025,40.35 v1(95.25,40.35) ; C6.1@91.175,80.375 91.175,81.3 v1(91.2,81.325) ; v1(93.9,55.3) 93.9,54.65 C19.1@94.35,54.2 100.15,54.2 v1(100.25,54.3) ; C4.1@94.825,68.275 95.725,68.275 v1(95.775,68.325) ; v1(95.075,64.575) C2.1@95.075,62.075 95.8,62.075 v1(96.05,61.825)
  Bottom Layer w0.508: v1(62.275,83.125) 62.275,85.125 62.95,85.8 v1(63.4,85.8) ; v1(92.35,67.05) 92.6,67.05 v1(95.075,64.575) 96.75,64.575 102.025,59.3 v1(105.275,59.3) 106.65,60.675 106.65,70.45 v1(107.025,70.825) ; v1(113.9,60.7) 116.275,60.7 121.132,55.843 TP2.1@122.781,55.843
  other v1: 62.275,84.525
VDD5: C29.2 C30.2 C36.2 C41.1 C42.2 C43.2 C44.2 C53.2 FB8.2 J11.5 PTC1.1 U5.1 U6.1 U8.3 U11.3 U13.5 U13.6 U13.11 U13.12 U16.2 VDR8.2 VDR9.2 | length 227.5
  Top Layer w0.254: C36.2@58.753,63.275 58.753,60.722 U8.3@58.824,60.651 ; U6.1@80.772,34.417 80.772,36.068 C29.2@80.645,36.195 80.875,36.425 v1(80.875,38.575) ; v1(102.5,38.575) 102.5,44.875 103.225,45.6 C30.2@104.253,45.6 104.345,45.692 U5.1@104.345,47.53
  Top Layer w0.508: v1@53.825,82.825 51.375,82.825 43.95,90.25 43.95,94.925 44.675,95.65 50.146,95.65 C53.2@50.673,95.123 51.435,95.885 U16.2@56.134,95.885 ; v1(57.575,63.2) 58.678,63.2 C36.2@58.753,63.275
  Top Layer w0.762: PTC1.1@108.875,36.85 110.775,34.95 121.157,34.95 C41.1@123.626,37.419 ; C43.2@113.597,37.7 113.597,37.003 114.1,36.5 116.9,36.5 117.497,37.097 C44.2@117.497,37.7 C41.1@121.7,37.7 ; U11.3@126.448,64.306 127.083,63.671 C42.2@127.083,62.034 127.083,60.383 126.086,59.386 126.086,37.686 125.819,37.419 C41.1@123.626,37.419 ; FB8.2@132.203,28.9 VDR8.2@129.197,28.9 129.197,31.848 C41.1@123.626,37.419
  Bottom Layer w0.508: v1(53.9,82.825) 53.9,66.875 v1(57.575,63.2) 58.775,63.2 67.35,54.625 67.35,43.8 72.575,38.575 v1(80.875,38.575) v1(102.5,38.575) 110.4,38.575 v1(110.5,38.475) ; J11.5@100.62,28.6 100.128,29.092 VDR9.2@100.128,31.3 100.128,35.228 100.49,35.59 103.874,35.59 104.109,35.825 110.425,35.825 v1(110.575,35.975)
VDD5_PERIPH: FB2.2 FB3.2 FB4.2 FB5.2 FB6.2 FB7.2 J1.38 PTC1.2 | length 178.3
  Top Layer w0.508: FB7.2@33.536,45.149 33.536,44.611 32.275,43.35 ; J1.38@36.357,65.233 34.574,63.45 27.15,63.45 25.825,62.125 25.825,52.9 ; FB4.2@37.525,55.226 37.525,54.775 36.65,53.9 26.825,53.9 25.825,52.9 ; FB2.2@37.6,49.151 26.726,49.151 25.825,48.25 ; FB3.2@82.277,28.275 82.625,28.623 82.625,32.225 v1(83.5,33.1) ; FB3.2@82.427,28.257 82.427,27.798 83.025,27.2 83.025,25.175 82.75,24.9 37.675,24.9 32.275,30.3 32.275,43.35 ; PTC1.2@105.475,36.85 105.475,34.425 106.15,33.75 106.15,30.9 107.775,29.275 110.45,29.275 111.375,30.2 v1(111.375,30.525) ; 25.825,48.25 25.825,45.35 27.825,43.35 32.275,43.35 ; 25.825,48.25 25.825,52.9
  Bottom Layer w0.508: v1(83.5,33.1) 86.65,36.25 103.6,36.25 v1(103.975,36.625) ; v1(111.375,30.525) FB6.2@111.375,29.573 111.749,29.2 114.902,29.2 FB5.2@115.45,29.749
XCLOUT: TP4.1 U1.138 | length 3.1
  Top Layer w0.254: U1.138@93.467,83.485 TP4.1@93.467,86.632
pads on no net: J11.6 U1.1 U1.2 U1.28 U1.35 U1.36 U1.37 U1.46 U1.47 U1.48 U1.49 U1.50 U1.51 U1.52 U1.53 U1.54 U1.62 U1.81 U1.82 U1.100 U1.110 U1.111 U1.112 U1.115 U1.116 U1.119 U1.122 U1.123 U1.124 U1.127 U1.128 U1.129 U1.130 U1.131 U1.133 U1.134 U1.135 U1.136 U1.137 U1.141 U1.142 U1.149 U1.150 U1.151 U1.152 U1.153 U1.156 U1.157 U1.158 U1.161 U1.162 U1.163 U1.164 U1.165 U1.168 U1.169 U1.175 U1.176 U7.1 U7.8 U7.9 U10.1 U10.4 U10.5 U10.6 U10.15 U10.16 U10.17 U10.22 U11. U13.1 U13.2 U13.7 U13.8 U13.13 U13.14 U13.15 U13.16 U13.19 U13.20 U13.21 U13.26 U13.27 U15.3 U15.6 U16.1 U16.5 U16.6 U16.7 U16.8

## Polygon pours and split planes (outlines as drawn)
GND on Bottom Layer "Bottom Layer-No Net" (solid, remove dead copper, pour order 7): 138.7,103 196.625,103 196.625,80.4 138.725,80.4 138.7,80.375 138.7,103
GND on Bottom Layer "Bottom Layer-No Net" (solid, remove dead copper, pour order 5): 25,103 25,24 137.85,24 137.85,103 25,103

## Keep-outs
Keep-Out Layer:
  circle w0.254: c200,28 r1.6
  circle w0.254: c200,100 r1.6
  circle w0.254: c30,100 r1.6
  circle w0.254: c30,28 r1.6
  lines w0.051: 25,24 25,103 205,103 205,24 25,24

## Other copper
Top Layer:
  rectangle net GND: 118.325,59.9 120.75,63.025
  rectangle net GND: 123.675,68.15 127.6,69.875
  rectangle net GND: 103.225,65.725 105.4,70.125
  rectangle net GND: 131.025,34.225 136.275,41.025
  rectangle net NetC50_2: 113.1,45.7 114.1,51.6
  rectangle net NetC48_2: 117,45.7 118.1,51.5
  rectangle net GND: 111.8,35.775 112.8,41.1
  rectangle net GND: 115.7,37.3 116.7,41.1
  rectangle net VDD5: 117,37.3 118,41.1
  rectangle net VDD5: 113.1,37.2 114.2,41.1
  rectangle net GND: 122.3,27.8 128.4,29.5
  rectangle net NetFB8_1: 133.2,25 135.6,29.5
  rectangle net V5: 119.4,25 132.6,27.4
  rectangle net V5: 116.3,25 119.4,29.5
  rectangle net NetFB1_1: 71.8,27.9 74.25,31.825
  rectangle net VDD5: 107.975,35.375 110.975,38.875
  rectangle net VDD5_PERIPH: 103.65,35.325 106.325,38.35
  rectangle net GND: 106.775,49.575 110.875,53.325
  rectangle net AGND: 71.1,65.125 73.45,65.85
  rectangle net GND: 153.125,95.225 154.2,96.875
  rectangle net GND: 152.45,97.45 152.95,98.55
  rectangle net GND: 151.425,97.825 152.45,98.55
  rectangle net GND: 138.875,100.45 155.1,102.575
  rectangle net GND: 138.875,97.75 140.9,100.45
Bottom Layer:
  rectangle net GND: 151.15,97.65 153.925,98.725
  rectangle net GND: 152.75,94.725 154.775,97.15
  rectangle net GND: 138.7,101.3 155.175,102.586
  rectangle net GND: 101.25,65.875 105.4,70.1

## Silkscreen, mask and mechanical layers (free items; w line width, h text height)
Mechanical 1:
  circle w0.254: c200,28 r1.6
  circle w0.254: c30,100 r1.6
  circle w0.254: c143.561,27.777 r1.6
  circle w0.254: c193.561,27.777 r1.6
  circle w0.254: c193.561,76.777 r1.6
  circle w0.254: c143.561,76.777 r1.6
  circle w0.254: c200,100 r1.6
  circle w0.254: c30,28 r1.6

## Dimensions
25,103 to 205,103 on Mechanical 13
205,103 to 205,24 on Mechanical 13

## Text inside footprints (layer, text, board x,y; h text height)
C41: Top Overlay "+" at 122.87,36.371 h0.51 r180
U2: Top Overlay "R" at 46.061,95.626 h0.51 r180; Top Overlay "K" at 48.495,95.61 h0.51 r180; Top Overlay "A" at 47.318,95.626 h0.51 r180
U13: Top Overlay "*" at 109.241,40.18 h0.51 r90; Mechanical 13 "*" at 109.241,40.18 h0.51 r90